# EAGLE board Mouse_Curr (EAGLE 9.6.2)
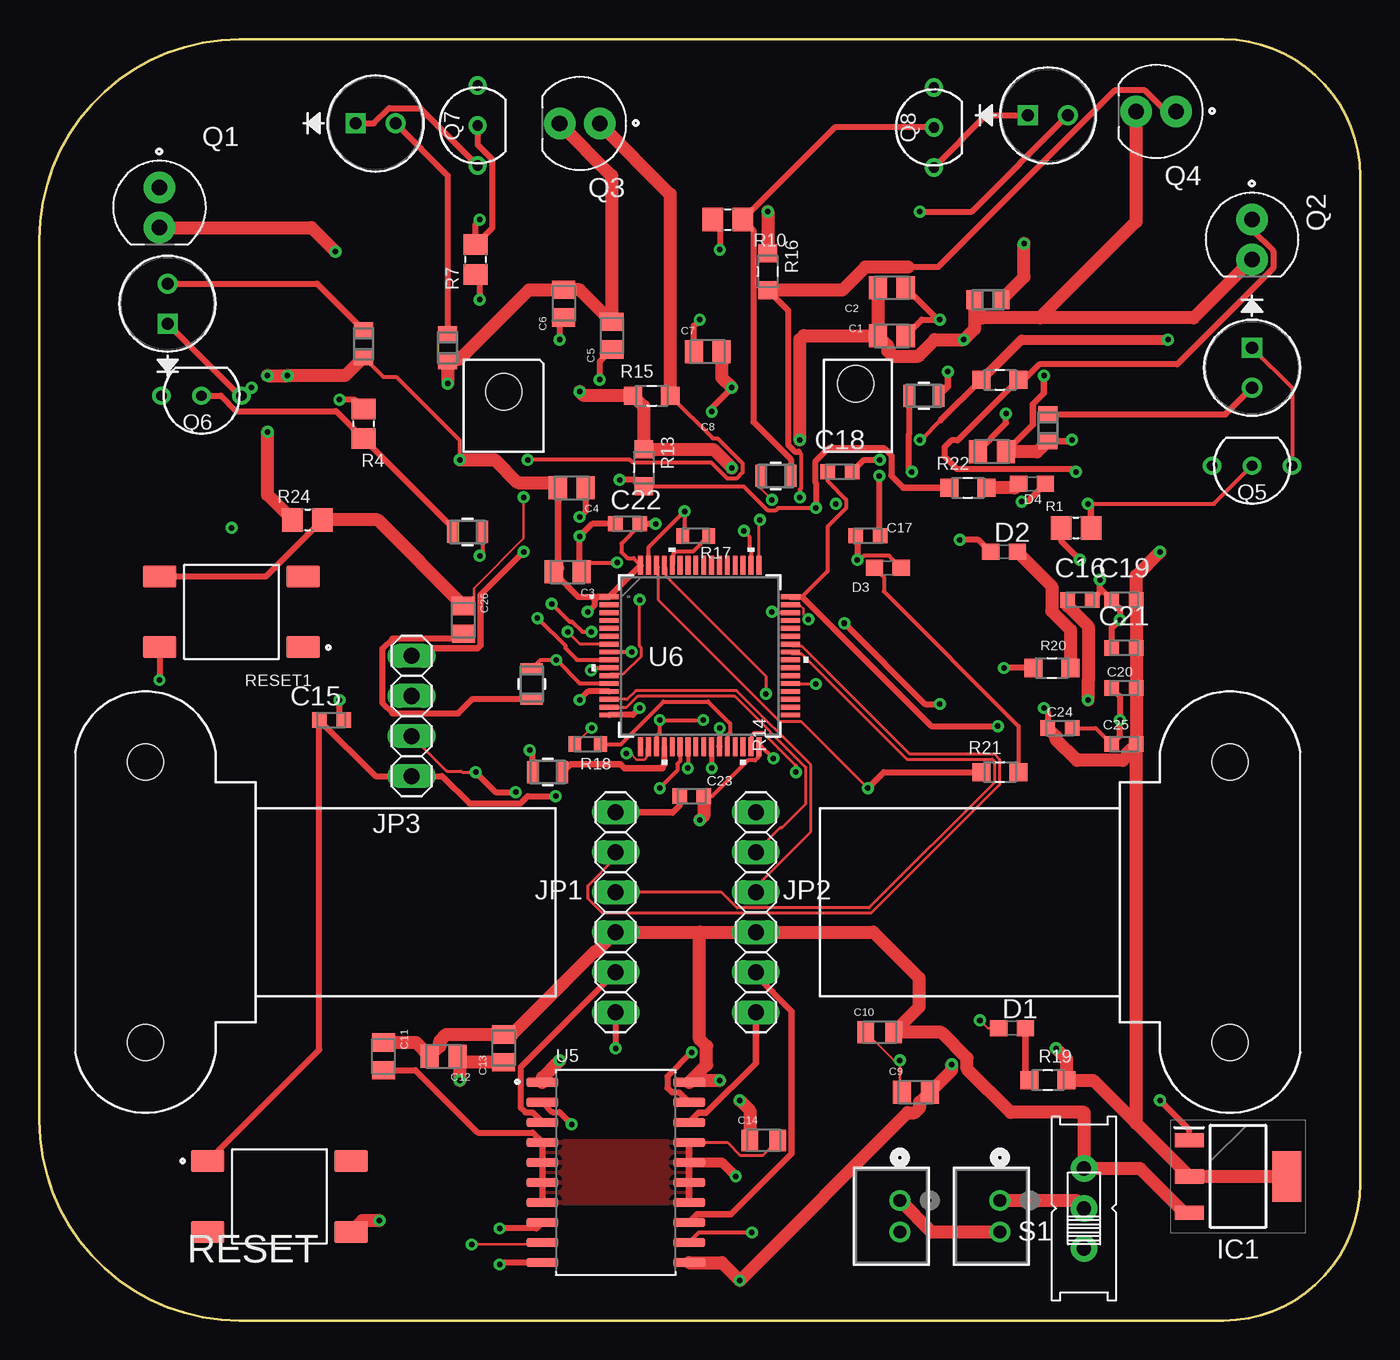
[diagram p0: board, top side]
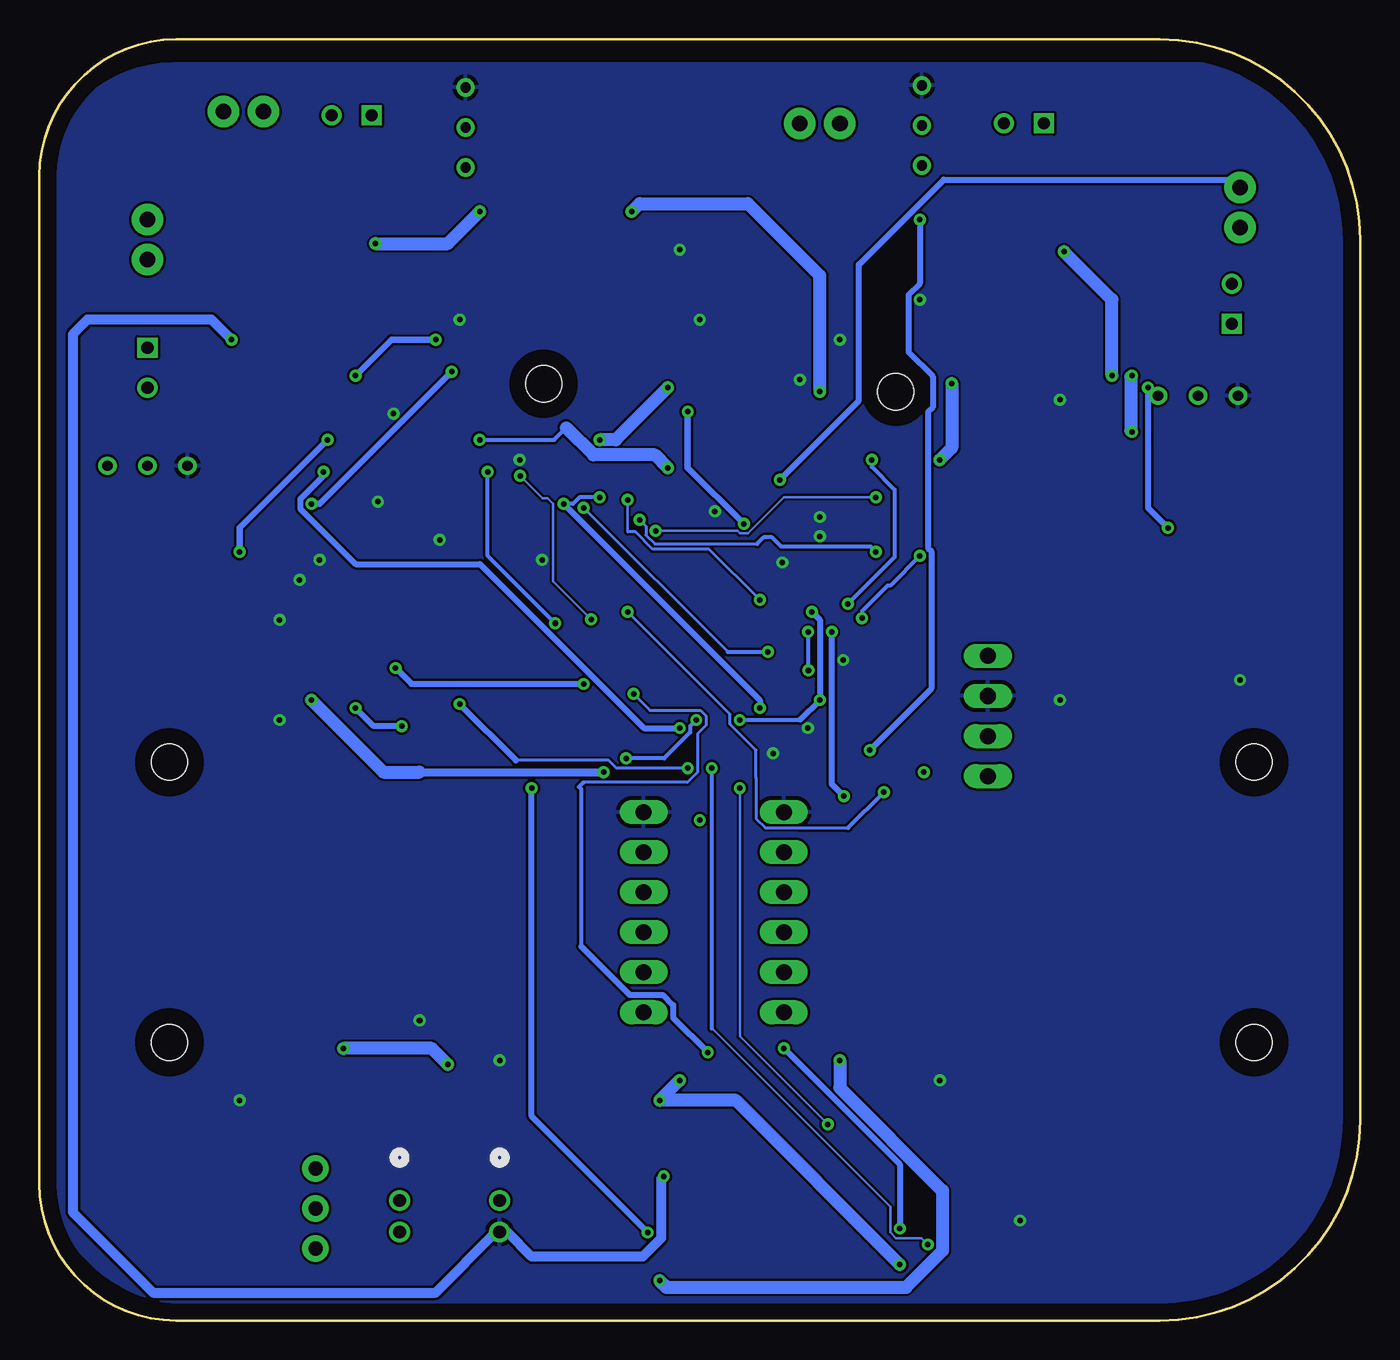
[diagram p1: board, bottom side, seen from below]

Size 83.82 x 81.28 mm. Coordinates in mm from the lower left corner, seen from the top.
Outline: 0,68.58 0,12.7 arc90 12.7,0 75.15,0 arc90 83.82,8.67 83.82,72.61 arc90 75.15,81.28 12.7,81.28 arc90 0,68.58
Copper layers (1*16): Top 0.035mm / dielectric 1.5mm / Bottom 0.035mm
Design rules "default": minimum track width 6mil, minimum drill 0.35mm, track to track 6mil, track to pad 6mil, pad to pad 6mil, via to via 6mil, smd to smd 6mil, copper to edge 40mil, drill to drill 6mil, minimum pad ring 10mil, minimum via ring 8mil, stop-mask expansion 4mil, vias tented up to drill 0mil, thermal gap 10mil
Holes 2.29 mm at 29.46,58.93 51.82,59.44

## Footprints (pad centres in the part's own frame; a part is rotated, then mirrored left to right if it is on the bottom)
CAPC2012X145N = smd 1.15 x 1.47: 1 -0.88,0; 2 0.88,0
CAPC2012X150N = smd 1.15 x 1.47: 1 -0.88,0; 2 0.88,0
CAPC2012X135N = smd 1.05 x 1.38: 1 -0.888,0; 2 0.888,0
CAPC1608X85 = smd 0.921 x 0.97: 1 -0.775,0; 2 0.775,0
0603 = smd 1.1 x 1: 1 -0.85,0; 2 0.85,0
SOT230P700X170-4N = smd 1.85 x 0.9: 1 -3.1,2.3; 2 -3.1,0; 3 -3.1,-2.3 | smd 1.85 x 3.2: 4 3.1,0
CONN_B2B-PH-K-S(LF)(SN)_JST = drill 0.813 pad 1.321: 1 0,0; 2 -2.007,0
1X06 = drill 1.016 long: 1 -6.35,0; 2 -3.81,0; 3 -1.27,0; 4 1.27,0; 5 3.81,0; 6 6.35,0
1X04 = drill 1.016 long: 1 -3.81,0; 2 -1.27,0; 3 1.27,0; 4 3.81,0
LED_INL-5AMIR15_INO = drill 0.762 pad 1.27 square: 1 0,0 | drill 0.762 pad 1.27: 2 2.54,0
XDCR_SFH_313_FA-3/4 = drill 1 pad 2: 1 -1.27,0; 2 1.27,0
TO92 = drill 0.65 pad 1.041: 1 -2.54,0; 2 0,0; 3 2.54,0
RESC2012X60 = smd 1.3 x 1.5: 1 -0.95,0; 2 0.95,0
RC0805N_PAN = smd 1.006 x 1.2: 1 -0.853,0; 2 0.853,0
0805_VIS = smd 0.703 x 1.4: 1 -0.952,0; 2 0.952,0
RES_ERA6AEB182V = smd 1.15 x 1.15: 1 -1.175,0; 2 1.175,0
RESC1608X60 = smd 0.799 x 0.974: 1 -0.815,0; 2 0.815,0
RES_ERJ6DQJ1R3V = smd 1.15 x 1.15: 1 -1.175,0; 2 1.175,0
TE_FSM4JSMA = smd 2.1 x 1.38: 1 -4.55,2.24; 2 4.55,2.24; 3 -4.55,-2.24; 4 4.55,-2.24
EG1218 = drill 0.9 pad 1.676: O -2.54,0; P 0,0; S 2.54,0
SOIC127P1032X265-20N = smd 2.05 x 0.6: 1 -4.655,5.715; 2 -4.655,4.445; 3 -4.655,3.175; 4 -4.655,1.905; 5 -4.655,0.635; 6 -4.655,-0.635; 7 -4.655,-1.905; 8 -4.655,-3.175; 9 -4.655,-4.445; 10 -4.655,-5.715; 11 4.655,-5.715; 12 4.655,-4.445; 13 4.655,-3.175; 14 4.655,-1.905; 15 4.655,-0.635; 16 4.655,0.635; 17 4.655,1.905; 18 4.655,3.175; 19 4.655,4.445; 20 4.655,5.715
LQFP64-10X10MM = smd 1.194 x 0.305: 1 -5.75,3.75; 2 -5.75,3.25; 3 -5.75,2.75; 4 -5.75,2.25; 5 -5.75,1.75; 6 -5.75,1.25; 7 -5.75,0.75; 8 -5.75,0.25; 9 -5.75,-0.25; 10 -5.75,-0.75; 11 -5.75,-1.25; 12 -5.75,-1.75; 13 -5.75,-2.25; 14 -5.75,-2.75; 15 -5.75,-3.25; 16 -5.75,-3.75; 33 5.75,-3.75; 34 5.75,-3.25; 35 5.75,-2.75; 36 5.75,-2.25; 37 5.75,-1.75; 38 5.75,-1.25; 39 5.75,-0.75; 40 5.75,-0.25; 41 5.75,0.25; 42 5.75,0.75; 43 5.75,1.25; 44 5.75,1.75; 45 5.75,2.25; 46 5.75,2.75; 47 5.75,3.25; 48 5.75,3.75 | smd 0.305 x 1.194: 17 -3.75,-5.75; 18 -3.25,-5.75; 19 -2.75,-5.75; 20 -2.25,-5.75; 21 -1.75,-5.75; 22 -1.25,-5.75; 23 -0.75,-5.75; 24 -0.25,-5.75; 25 0.25,-5.75; 26 0.75,-5.75; 27 1.25,-5.75; 28 1.75,-5.75; 29 2.25,-5.75; 30 2.75,-5.75; 31 3.25,-5.75; 32 3.75,-5.75; 49 3.75,5.75; 50 3.25,5.75; 51 2.75,5.75; 52 2.25,5.75; 53 1.75,5.75; 54 1.25,5.75; 55 0.75,5.75; 56 0.25,5.75; 57 -0.25,5.75; 58 -0.75,5.75; 59 -1.25,5.75; 60 -1.75,5.75; 61 -2.25,5.75; 62 -2.75,5.75; 63 -3.25,5.75; 64 -3.75,5.75
MOTOR = hole 2.286: -28.575,14.605; -28.575,-3.175

## Placement (x,y rotation side)
C1  0.1 uF  [CAPC2012X145N]  54.1,62.48 180 top
C2  4.7 uF  [CAPC2012X150N]  54.1,65.53 180 top
C3  0.1 uF  [CAPC2012X145N]  33.53,47.5 180 top
C4  4.7 uF  [CAPC2012X150N]  33.78,52.83 180 top
C5  0.1 uF  [CAPC2012X145N]  36.32,62.48 90 top
C6  4.7 uF  [CAPC2012X150N]  33.27,64.52 90 top
C7  0.1 uF  [CAPC2012X145N]  42.42,61.47 0 top
C8  4.7 uF  [CAPC2012X150N]  60.45,55.12 0 top
C9  22 uF  [CAPC2012X145N]  55.63,14.48 0 top
C10  10 uF  [CAPC2012X135N]  53.34,18.29 0 top
C11  4.7uF  [CAPC2012X150N]  21.84,16.76 270 top
C12  4.7uF  [CAPC2012X150N]  25.65,16.76 180 top
C13  0.1uF  [CAPC2012X145N]  29.46,17.27 90 top
C14  10uF  [CAPC2012X135N]  45.97,11.43 0 top
C15  0.1 μF  [CAPC1608X85]  18.54,38.1 0 top
C16  2.2 μF  [CAPC1608X85]  66.04,45.72 0 top
C17  2.2 μF  [CAPC1608X85]  52.58,49.78 180 top
C18  0.1 μF  [CAPC1608X85]  50.8,53.85 0 top
C19  0.1 μF  [CAPC1608X85]  68.83,45.72 0 top
C20  1 μF  [CAPC1608X85]  68.83,40.13 180 top
C21  0.1 μF  [CAPC1608X85]  68.83,42.67 0 top
C22  0.1 μF  [CAPC1608X85]  37.34,50.55 0 top
C23  0.1 μF  [CAPC1608X85]  41.4,33.27 0 top
C24  0.1 μF  [CAPC1608X85]  64.77,37.59 180 top
C25  10 μF  [CAPC1608X85]  68.83,36.58 0 top
C26  0.1 uF  [CAPC2012X145N]  26.92,44.45 270 top
D1  LTST-C191KRKT  [0603]  61.72,18.54 0 top
D2  LTST-C191KGKT  [0603]  61.21,48.77 0 top
D3  LTST-C191KGKT  [0603]  53.85,47.75 180 top
D4  LTST-C191KGKT  [0603]  62.99,53.09 180 top
IC1  AZ1117IH-3.3TRG1  [SOT230P700X170-4N]  76.07,9.14 0 top
J1  B2B-PH-K-S(LF)(SN)  [CONN_B2B-PH-K-S(LF)(SN)_JST]  60.96,7.62 90 top
J2  B2B-PH-K-S(LF)(SN)  [CONN_B2B-PH-K-S(LF)(SN)_JST]  54.61,7.62 90 top
JP1  [1X06]  36.58,25.91 270 top
JP2  [1X06]  45.47,25.91 270 top
JP3  [1X04]  23.62,38.35 90 top
LED1  INL-5AMIR15  [LED_INL-5AMIR15_INO]  76.96,61.72 270 top
LED2  INL-5AMIR15  [LED_INL-5AMIR15_INO]  8.13,63.25 90 top
LED3  INL-5AMIR15  [LED_INL-5AMIR15_INO]  20.07,75.95 0 top
LED4  INL-5AMIR15  [LED_INL-5AMIR15_INO]  62.74,76.45 0 top
Q1  SFH_313_FA-3/4  [XDCR_SFH_313_FA-3/4]  7.62,70.61 270 top
Q2  SFH_313_FA-3/4  [XDCR_SFH_313_FA-3/4]  76.96,68.58 270 top
Q3  SFH_313_FA-3/4  [XDCR_SFH_313_FA-3/4]  34.29,75.95 180 top
Q4  SFH_313_FA-3/4  [XDCR_SFH_313_FA-3/4]  70.87,76.71 180 top
Q5  BS170  [TO92]  76.96,54.23 180 top
Q6  BS170  [TO92]  10.29,58.67 180 top
Q7  BS170  [TO92]  27.81,75.82 90 top
Q8  BS170  [TO92]  56.77,75.69 90 top
R1  47kO  [RESC2012X60]  65.79,50.29 0 top
R2  51O  [RC0805N_PAN]  64.01,56.64 90 top
R3  100O  [0805_VIS]  56.13,58.67 0 top
R4  47kO  [RESC2012X60]  20.57,56.9 270 top
R5  51O  [RC0805N_PAN]  20.57,61.98 90 top
R6  100O  [0805_VIS]  27.18,50.04 180 top
R7  47kO  [RESC2012X60]  27.69,67.31 90 top
R8  51O  [RC0805N_PAN]  25.91,61.72 90 top
R9  100O  [0805_VIS]  32.26,34.8 180 top
R10  47kO  [RESC2012X60]  43.69,69.85 0 top
R11  51O  [RC0805N_PAN]  60.2,64.77 0 top
R12  100O  [0805_VIS]  46.74,53.59 0 top
R13  1.8kO  [RES_ERA6AEB182V]  38.35,54.1 270 top
R14  1.8kO  [RES_ERA6AEB182V]  60.96,59.69 0 top
R15  1.8kO  [RES_ERA6AEB182V]  38.86,58.67 0 top
R16  1.8kO  [RES_ERA6AEB182V]  46.23,66.55 270 top
R17  10K  [RESC1608X60]  41.66,49.78 180 top
R18  10K  [RESC1608X60]  34.8,36.58 0 top
R19  1.3 Ohm  [RES_ERJ6DQJ1R3V]  64.01,15.24 180 top
R20  1.3 Ohm  [RES_ERJ6DQJ1R3V]  64.26,41.4 0 top
R21  1.3 Ohm  [RES_ERJ6DQJ1R3V]  60.96,34.8 0 top
R22  1.3 Ohm  [RES_ERJ6DQJ1R3V]  58.93,52.83 0 top
R23  100O  [0805_VIS]  31.24,40.39 90 top
R24  47kO  [RESC2012X60]  17.02,50.8 0 top
RESET  FSM4JSMA  [TE_FSM4JSMA]  15.24,7.87 0 top
RESET1  FSM4JSMA  [TE_FSM4JSMA]  12.19,44.96 180 top
S1  EG1218S  [EG1218]  66.29,7.11 90 top
U5  L293DD  [SOIC127P1032X265-20N]  36.58,9.4 0 top
U6  STM32F205RGT6  [LQFP64-10X10MM]  41.91,42.16 0 top
U$1  [MOTOR]  35.31,20.83 0 top
U$2  [MOTOR]  46.99,32.26 180 top

## Library data of the parts
C1 C3 C5 C7 C13 C26 = C2012X7R2A104K125AA; DESCRIPTION: 0.1µF ±10% 100V Ceramic Capacitor X7R 0805 (2012 Metric); MF: TDK; MP: C2012X7R2A104K125AA; PACKAGE: 2012 TDK; PURCHASE-URL: https://pricing.snapeda.com/search/part/C2012X7R2A104K125AA/?ref=eda
C2 C4 C6 C8 C11 C12 = CGA4J1X7R1E475K125AE; DESCRIPTION: 4.7µF ±10% 25V Ceramic Capacitor X7R 0805 (2012 Metric); MF: TDK; MP: CGA4J1X7R1E475K125AE; PACKAGE: 2012 TDK; PURCHASE-URL: https://pricing.snapeda.com/search/part/CGA4J1X7R1E475K125AE/?ref=eda
C9 = C2012X5R1A226M125AB; DESCRIPTION: 22µF ±20% 10V Ceramic Capacitor X5R 0805 (2012 Metric); MF: TDK; MP: C2012X5R1A226M125AB; PACKAGE: 2012 TDK; PURCHASE-URL: https://pricing.snapeda.com/search/part/C2012X5R1A226M125AB/?ref=eda
C10 C14 = GRM21BR61C106KE15L; DESCRIPTION: SMD Capacitor X5R(EIA) with Capacitance: 10uF Tol. 10%. Rated Voltage: 16Vdc; DIGI-KEY_PART_NUMBER: 490-3886-2-ND; MF: Murata; MP: GRM21BR61C106KE15L; PACKAGE: 2012 Murata; PURCHASE-URL: https://pricing.snapeda.com/search/part/GRM21BR61C106KE15L/?ref=eda
C15 C22-C25 = Capacitor2; CATEGORY: Capacitor
C16-C21 = Capacitor; CATEGORY: Capacitor
D1 = LTST-C191KRKT; AVAILABILITY: In Stock; DESCRIPTION: Red 631nm LED Indication - Discrete 2V 0603 (1608 Metric); MF: Lite-On Inc.; MP: LTST-C191KRKT; PACKAGE: 0603 Lite-On Inc.; PRICE: None; PURCHASE-URL: https://pricing.snapeda.com/search/part/LTST-C191KRKT/?ref=eda
D2-D4 = LTST-C191KGKT; AVAILABILITY: In Stock; DESCRIPTION: Green 571nm LED Indication - Discrete 2V 0603 (1608 Metric); MF: Lite-On Inc.; MP: LTST-C191KGKT; PACKAGE: 0603 Lite-On Inc.; PRICE: None; PURCHASE-URL: https://pricing.snapeda.com/search/part/LTST-C191KGKT/?ref=eda
IC1 = AZ1117IH-3.3TRG1; AVAILABILITY: In Stock; DESCRIPTION: Linear Voltage Regulator IC Positive Fixed 1 Output 1A SOT-223-3; MF: Diodes Inc.; MP: AZ1117IH-3.3TRG1; PACKAGE: SOT-223 Diodes Inc.; PRICE: None; PURCHASE-URL: https://pricing.snapeda.com/search/part/AZ1117IH-3.3TRG1/?ref=eda
J1 J2 = 2 Pin JST Connector; COPYRIGHT: Copyright (C) 2022 Ultra Librarian. All rights reserved.; DIGI-KEY_PART_NUMBER_1: 455-1704-ND; MANUFACTURER_PART_NUMBER: B2B-PH-K-S(LF)(SN); MFR_NAME: JST
JP1-JP3 = pinhead
LED1-LED4 = IR Emitter; COPYRIGHT: Copyright (C) 2022 Ultra Librarian. All rights reserved.; DIGI-KEY_PART_NUMBER_1: 1830-INL-5AMIR15-ND; MANUFACTURER_PART_NUMBER: INL-5AMIR15; MFR_NAME: Inolux
Q1-Q4 = SFH_313_FA-3_4; AVAILABILITY: Unavailable; DESCRIPTION: Phototransistors 870nm Top View Radial - 2 Leads; MF: OSRAM Opto; MP: SFH 313 FA-3/4; PACKAGE: Radial-2 Osram Opto; PRICE: None
Q5-Q8 = BS170-CORRECT; AVAILABILITY: In Stock; DESCRIPTION: N-Channel 60 V 500mA (Ta) 830mW (Ta) Through Hole TO-92-3; MF: ON; MP: BS170; PACKAGE: E-PKG AXIAL-LEADED-2 ON Semiconductor; PRICE: None; PURCHASE-URL: https://pricing.snapeda.com/search/part/BS170/?ref=eda
R1 R4 R7 R10 R24 = RC0805JR-1347KL; DESCRIPTION: 47 kOhms ±5% 0.125W, 1/8W Chip Resistor 0805 (2012 Metric) Thick Film; DIGI-KEY_PART_NUMBER: 13-RC0805JR-1347KLTR-ND; MF: Yageo; MP: RC0805JR-1347KL; PACKAGE: 0805 Yageo; PURCHASE-URL: https://pricing.snapeda.com/search/part/RC0805JR-1347KL/?ref=eda
R2 R5 R8 R11 = 51resistor; COPYRIGHT: Copyright (C) 2022 Ultra Librarian. All rights reserved.; MANUFACTURER_PART_NUMBER: ERJ-6ENF51R0V; MFR_NAME: Panasonic
R3 R6 R9 R12 R23 = 100resistor; COPYRIGHT: Copyright (C) 2022 Ultra Librarian. All rights reserved.; DIGI-KEY_PART_NUMBER_1: Y4022-100ACT-ND; DIGI-KEY_PART_NUMBER_2: Y4022-100ADKR-ND; DIGI-KEY_PART_NUMBER_3: Y4022-100ATR-ND; MANUFACTURER_PART_NUMBER: Y4022100R000Q0R; MFR_NAME: Vishay
R13-R16 = ERA6AEB182V; DESCRIPTION: Res Thin Film 0805 1.8K Ohm 0.1% 0.125W(1/8W) ±25ppm/C Molded SMD Automotive Punched T/R; DIGI-KEY_PART_NUMBER: P1.8KDATR-ND; MF: Panasonic; MP: ERA6AEB182V; PACKAGE: 2012-2 Panasonic; PURCHASE-URL: https://pricing.snapeda.com/search/part/ERA6AEB182V/?ref=eda
R17 R18 = Resistor2; CATEGORY: Resistor; SUB-CATEGORY: Fixed
R19-R22 = ERJ6DQJ1R3V; AVAILABILITY: In Stock; DESCRIPTION: 1.3 Ohms 5% 0.5W, 1/2W Chip Resistor 0805 (2012 Metric) Automotive AEC-Q200, Current Sense Thick Film; MF: Panasonic; MP: ERJ-6DQJ1R3V; PACKAGE: 2012-2 Panasonic; PRICE: None; PURCHASE-URL: https://pricing.snapeda.com/search/part/ERJ-6DQJ1R3V/?ref=eda
RESET RESET1 = FSM4JSMA; COMMENT: 4-1437565-1; CONFIGURATION_POLE-THROW: Single Pole - Single Throw; CONTACT_CURRENT_RATING: 50 mA; DESCRIPTION: Tactile Switch SPST-NO Top Actuated Surface Mount; DIGI-KEY_PART_NUMBER: 450-1759-2-ND; EU_ROHS_COMPLIANCE: Compliant; MF: TE Connectivity; MP: FSM4JSMA; PACKAGE: None; PURCHASE-URL: https://pricing.snapeda.com/search/part/FSM4JSMA/?ref=eda
S1 = EG1218; AVAILABILITY: In Stock; DESCRIPTION: Slide Switch SPDT Through Hole; MF: E-Switch; MP: EG1218; PACKAGE: None; PRICE: None; PURCHASE-URL: https://pricing.snapeda.com/search/part/EG1218/?ref=eda
U5 = L293DD; DESCRIPTION: Bipolar Motor Driver Parallel 20-SOIC; DIGI-KEY_PART_NUMBER: 497-1390-5-ND; MF: STMicroelectronics; MP: L293DD; PACKAGE: SOIC-20 STMicroelectronics; PURCHASE-URL: https://pricing.snapeda.com/search/part/L293DD/?ref=eda
U6 = stm32f205rgt6; COPYRIGHT: Copyright (C) 2021 Ultra Librarian. All rights reserved.; MANUFACTURER_PART_NUMBER: STM32F205RGT6; MFR_NAME: STMicroelectronics
U$1 U$2 = micromouseMotors

## Nets
3V3: C1.2 C2.2 C3.2 C4.2 C5.2 C6.2 C7.2 C8.2 C9.2 C18.1 C19.2 C20.1 C21.2 C22.2 C23.2 C24.2 C25.2 IC1.2 IC1.4 Q1.2 Q2.2 Q3.2 Q4.2 R2.1 R5.1 R8.1 R11.1 R19.1 R24.1 U5.1 U5.11 U6.1 U6.13 U6.19 U6.32 U6.48 U6.64
AGND: R13.1 R14.1 R15.1 R16.1
GND: C1.1 C2.1 C3.1 C4.1 C5.1 C6.1 C7.1 C8.1 C9.1 C10.1 C12.1 C13.1 C15.2 C16.2 C17.2 C18.2 C19.1 C20.2 C21.1 C22.1 C23.1 C24.1 C25.1 D1.1 D2.1 D3.1 D4.1 IC1.1 J2.2 JP1.1 JP2.1 JP3.3 Q5.3 Q6.3 Q7.3 Q8.3 R1.1 R4.1 R7.1 R10.1 R17.2 R18.1 R23.2 RESET1.2 RESET.4 U6.12 U6.18 U6.63
M1L: JP1.6 U5.8
M1R: JP2.6 U5.18
M2L: JP1.5 U5.3
M2R: JP2.5 U5.13
MGND: C11.2 C14.2 U5.4 U5.5 U5.6 U5.7 U5.14 U5.15 U5.16 U5.17
N$1: Q5.2 R1.2 R3.2
N$2: Q6.2 R4.2 R6.2
N$3: LED2.2 R5.2
N$4: LED2.1 Q6.1
N$5: LED1.2 R2.2
N$6: LED1.1 Q5.1
N$7: Q7.2 R7.2 R9.2
N$8: LED3.2 R8.2
N$9: LED3.1 Q7.1
N$10: Q8.2 R10.2 R12.2
N$11: LED4.2 R11.2
N$12: LED4.1 Q8.1
N$13: J1.2 J2.1
N$20: C17.1 U6.47
N$21: R17.1 U6.60
N$22: R18.2 U6.28
N$23: C16.1 U6.31
N$24: J1.1 S1.P
N$25: D1.2 R19.2
N$26: D2.2 R20.2
N$27: D3.2 R21.2
N$28: D4.2 R22.2
N$30: C26.2 R23.1
NRST: C15.1 JP3.1 RESET.1 U6.7
PA0: JP2.3 U6.14
PA1: JP2.2 U6.15
PA2: Q4.1 R16.2 U6.16
PA4: R9.1 U6.20
PA6: U5.2 U6.22
PA7: U5.9 U6.23
PA8: JP1.3 U6.41
PA9: JP1.2 U6.42
PA15: C26.1 R24.2 RESET1.4 U6.50
PB0: R3.1 U6.26
PB1: Q2.1 R14.2 U6.27
PB8: U5.19 U6.61
PB9: R21.1 U5.12 U6.62
PC0: Q1.1 R13.2 R22.1 U6.8
PC1: R6.1 U6.9
PC2: Q3.1 R15.2 U6.10
PC3: R12.1 U6.11
PC6: R20.1 U6.37
SWCLK: JP3.4 U6.49
SWDIO: JP3.2 U6.46
VCC: C10.2 C11.1 C12.2 C13.2 C14.1 IC1.3 JP1.4 JP2.4 S1.S U5.10 U5.20

## Tracks (layer width: path | path; a pad name or v marks a point on that pad's centre or on a via)
3V3  (via drill 0.35)
  Top 0.254: C23.2 42.69,33.27 44.96,35.54 45.43,35.54 45.63,35.74 45.63,36.39 U6.32 45.84,36.41 v46.58,35.67 | R5.1 21.83,59.87 22.64,59.87 26.67,55.83 v26.67,54.61 | C22.2 38.11,50.47 36.93,49.29 36.93,48.75 37.32,48.36 37.71,48.36 38.11,47.96 | v42.13,38.1 v39.37,38.1 39.37,37.27 39.19,37.09 39.19,36.44 U6.19 | 48.4,45.91 50.02,47.54 50.02,50.37 51.2,51.54 51.2,52.09 50.02,53.27 C18.1
  Top 0.381: 38.11,47.96 U6.64 U6.1 | C3.2 33.49,46.66 33.49,46.62 34.2,45.91 U6.1 | U6.48 48.4,45.91 56.6,37.71 v60.82,37.71 | v63.75,38.86 63.99,38.62 C24.2 | U6.1 35.42,45.91 35.22,45.71 35.22,45.38 v34.8,44.96 | U6.13 34.83,39.91 v34.29,39.37
  Top 0.406: 32.9,47.75 C4.2 | C8.2 63.05,56.84 63.05,58.15 63.75,58.85 v63.75,59.94 | v65.53,55.88 65.44,55.79 R2.1 | v43.94,59.18 42.67,57.91 v42.67,57.66 | v39.12,50.55 C22.2
  Top 0.813: C24.2 64.53,37.06 64.53,36.88 65.87,35.53 68.75,35.53 69.08,35.86 69.08,36.05 C25.2 | C2.2 C1.2 | R2.1 63.34,55.12 C8.2 | C7.2 43.3,59.83 v43.94,59.18 | v57.91,16.26 57.91,15.88 C9.2 55.88,13.85 55.88,13.51 55.55,13.18 55.09,13.18 v44.45,2.54 43.31,3.68 U5.11 | v64.52,17.27 65.18,16.61 R19.1 66.88,15.24 69.61,12.51 | 69.61,12.51 IC1.2 IC1.4 | 69.61,12.51 C25.2 | C3.2 32.9,47.75 | R5.1 19.39,59.94 v15.75,59.94 v14.48,59.94 | v25.91,59.44 R8.1 26.04,61 26.68,61 31.07,65.4 C6.2 34.29,65.4 C5.2 36.32,72.64 Q3.2 | v26.67,54.61 28.91,54.61 30.36,53.16 32.57,53.16 C4.2 | v71.12,48.77 69.61,47.26 C19.2 C21.2 C20.1 C25.2 | Q2.2 73.26,63.61 63.5,63.61 | 63.5,63.61 59.86,63.61 59.48,64 59.48,64.64 R11.1 59.34,62.9 v58.67,62.23 56.83,62.23 55.79,61.19 54.18,61.19 53.85,61.52 53.85,61.86 C1.2 | v48.26,55.88 48.26,62.23 48.51,62.48 C1.2 | Q4.2 69.6,69.71 63.5,63.61 | Q1.2 17.27,69.34 v18.8,67.82 | R24.1 14.48,52.39 v14.48,56.39 | U5.1 31.92,15.41 v33.02,16.51 | C23.2 42.18,32.02 v41.91,31.75
  Bottom 0.254: v14.48,56.39 14.55,56.46 | 14.55,59.87 v14.48,59.94 | 35.52,38.14 35.56,38.1 v39.37,38.1 | v42.13,38.1 42.52,37.71 42.52,37.32 44.17,35.67 v46.58,35.67
  Bottom 0.381: v60.82,37.71 62.6,37.71 v63.75,38.86 | 35.52,38.14 v34.29,39.37 34.29,44.45 v34.8,44.96
  Bottom 0.406: v63.75,59.94 61.47,62.23 v58.67,62.23 | v71.12,48.77 71.12,50.29 v65.53,55.88 | v42.67,57.66 42.67,54.1 v39.12,50.55
  Bottom 0.813: v48.26,55.88 47.24,55.88 v43.94,59.18 | v15.75,59.94 15.75,64.77 v18.8,67.82 | v25.91,59.44 25.91,55.37 v26.67,54.61 | 14.55,59.87 14.55,56.46 | v57.91,16.26 58.93,17.27 v64.52,17.27 | v33.02,16.51 33.02,14.78 26.5,8.25 26.5,4.44 28.82,2.11 44.02,2.11 v44.45,2.54
AGND  (via drill 0.35)
  Top 0.254: 57.2,57.1 55.97,55.88 v55.88,55.88
  Top 0.381: R14.1 57.2,57.1
  Top 0.635: R14.1 62.32,62.23 v71.63,62.23
  Top 0.813: v43.94,54.1 42.77,55.28 R13.1 38.35,58.01 R15.1 34.54,58.67 v34.29,58.93 | v46.23,70.36 R16.1
  Bottom 0.254: v55.88,55.88 51.15,55.88 50.39,56.64
  Bottom 0.635: v71.63,62.23 72.9,63.5 80.77,63.5 81.7,62.57 81.7,6.88 76.6,1.78 58.67,1.78 54.86,5.59 54.61,5.59
  Bottom 0.813: v43.94,54.1 44.75,54.91 48.66,54.91 50.39,56.64 | v34.29,58.93 34.29,66.29 38.86,70.87 45.72,70.87 v46.23,70.36
GND  (via drill 0.35)
  Top 0.152: D1.1 60.2,18.54 v59.69,19.05 | C9.1 54.61,14.61 v54.61,16.51 54.23,16.51 C10.1 | R18.1 35,37.59 v35.05,37.59 | U6.18 38.54,36.3 38.54,35.72 38.41,35.59 37.91,35.59 37.52,35.98 v37.25,35.98 | C23.1 40.63,33.02 | 40.13,32.26 40.18,32.21
  Top 0.254: U6.12 34.3,40.41 v32.81,41.91 31.81,41.91 R23.2 | C3.1 35,48.09 v36.66,48.09 | U6.63 38.66,49.05 v40.94,51.34 40.94,49.89 R17.2 | v51.92,48.26 52.06,48.26 52.33,48.53 53.92,48.53 D3.1 | C24.1 67.04,37.59 C25.1
  Top 0.381: IC1.1 72.97,12.12 v71.12,13.97 | R4.1 20,58.42 v19.05,58.42 | R7.1 27.94,66.11 v27.94,64.77 | C6.1 33.02,63.38 v33.02,62.23 | C5.1 35.56,60.84 v35.56,59.69 | C7.1 41.54,63.13 v41.91,63.5 | R10.1 43.18,69.41 v43.18,67.94 | C2.1 57.01,63.5 v57.15,63.5 56,63.5 C1.1 | C22.1 35.08,50.55 v34.29,49.76 34.29,47.62 C3.1 | C4.1 34.66,51.35 v34.29,50.98 | C18.2 52.34,54.61 v53.34,54.61 | C17.2 51.92,49.67 v51.92,48.26 | D2.1 59.6,49.53 v58.42,49.53 | C8.1 60.41,55.96 60.41,55.99 61.35,56.93 v61.35,57.54 | D4.1 62.71,51.96 v62.34,51.96 | R1.1 64.84,49.46 v66.04,48.26 | C16.2 67.31,46.22 v67.31,46.99 67.31,46.47 C19.1 68.58,45.2 v68.58,44.45 68.06,43.93 C21.1 | C25.1 68.58,37.1 v68.58,38.1 68.58,39.61 C20.2 | RESET1.2 7.64,40.66 v7.62,40.64 | C15.2 19.05,38.37 v19.05,39.37
  Top 0.406: JP1.1 40.13,32.26 | 40.18,32.21 40.63,32.66 40.63,33.02
  Top 0.813: C13.1 26.91,16.39 C12.1 26.67,16.63 v26.67,15.24 | RESET.4 20.51,6.35 v21.59,6.35
  pour Bottom: 1.89,79.76 75.33,79.76 arc-90 83.46,71.63 83.46,10.41 arc-90 74.06,1.02 11.43,1.02 arc-90 -0.25,12.7 -0.25,74.57 arc-45
M1L  (via drill 0.35)
  Top 0.381: JP1.6 v36.58,17.27 | U5.8 31.54,5.84 v29.21,5.84
  Bottom 0.381: v36.58,17.27 29.21,9.91 v29.21,5.84
M1R
  Top 0.406: U5.18 41.84,13.19 42.31,13.19 45.47,16.34 JP2.6
M2L
  Top 0.381: U5.3 31.29,13.2 30.84,13.2 30.55,13.49 30.55,16.07 JP1.5
M2R
  Top 0.406: U5.13 41.74,6.73 43.88,6.73 47.74,10.59 47.74,19.62 45.47,21.9 JP2.5
MGND  (via drill 0.35)
  Top 0.178: U5.17 43.66,11.3 44.46,10.5 45.93,10.5 C14.2
  Top 0.381: C11.2 23.86,15.88 27.81,11.93 31.29,11.93 U5.4
  Top 0.406: U5.7 U5.6 U5.5 U5.4 | U5.17 41.23,10.29 41.1,10.16 U5.16 U5.15 U5.14
  Top 0.635: U5.16 43.31,10.03 v44.2,9.14
  Bottom 0.635: v44.2,9.14 44.36,8.98 44.36,5.24 45.54,4.06 52.58,4.06 54.1,5.59 54.61,5.59
  pour Top: 32,11.43 32,7.37 41.4,7.37 41.4,11.43
N$1  (via drill 0.35)
  Top 0.254: v66.55,51.82 74.55,51.82 Q5.2
  Top 0.406: v57.66,60.2 57.66,59.25 R3.2 | v66.55,51.82 66.74,51.63 R1.2
  Bottom 0.406: v57.66,60.2 66.04,51.82 v66.55,51.82
N$2
  Top 0.381: R6.2 26.23,50.29 R4.2 18.82,57.7 12.5,57.7 11.52,58.67 Q6.2
N$3
  Top 0.381: R5.2 17.62,65.79 LED2.2
N$4  (via drill 0.35)
  Top 0.381: LED2.1 12.7,58.67 Q6.1 13.34,59.18 v13.46,59.18
  Bottom 0.381: v13.46,59.18 13.46,51.56 v12.19,50.29
N$5
  Top 0.381: R2.2 75.28,57.49 LED1.2
N$6
  Top 0.254: LED1.1 79.5,59.18 Q5.1
N$7  (via drill 0.35)
  Top 0.381: Q7.2 27.81,74.58 28.73,73.66 28.73,69.31 R7.2 27.69,69.6 v27.94,69.85 | R9.2 31.31,36 v31.12,36.2
  Bottom 0.381: v27.94,69.85 27.94,65.79 28.66,65.07 28.66,61.45 27.11,59.9 27.11,57.95 27.42,57.65 27.42,49.01 27.22,48.81 27.22,40.09 v31.12,36.2
N$8
  Top 0.381: LED3.2 25.91,72.64 R8.2
N$9
  Top 0.381: LED3.1 21.22,75.95 22.2,76.92 24.17,76.92 Q7.1
N$10
  Top 0.381: R12.2 47.69,54.64 45.31,57.02 45.31,69.18 R10.2 50.48,75.69 Q8.2
N$11  (via drill 0.35)
  Top 0.381: LED4.2 59.18,70.36 v55.88,70.36
  Top 0.813: R11.2 62.48,66.2 v62.48,68.33
  Bottom 0.813: v62.48,68.33 57.91,68.33 v55.88,70.36
N$12
  Top 0.381: Q8.1 60.07,76.45 LED4.1
N$13
  Top 0.813: J1.2 56.62,5.61 J2.1
N$20  (via drill 0.35)
  Top 0.152: v48.8,44.48 48.48,44.8 48.48,45.16 48.23,45.41 U6.47
  Top 0.381: C17.1 53.31,49.83 v53.31,53.59
  Bottom 0.152: v53.31,53.59 51.89,52.17 51.56,52.17 51.21,51.81 51.21,46.89 v48.8,44.48
N$21
  Top 0.254: R17.1 41.48,48.79 40.39,48.79 40.23,48.63 40.23,47.98 U6.60
N$22
  Top 0.254: R18.2 36.92,36.58 39.61,39.27 42.44,39.27 43.84,37.86 43.84,37.32 43.66,37.14 U6.28
N$23  (via drill 0.35)
  Top 0.178: 48.01,35.21 45.93,37.29
  Top 0.254: 45.93,37.29 45.39,37.29 45.23,37.13 45.23,36.48 U6.31 | 48.01,35.21 v48.01,34.8
  Top 0.813: C16.1 65.27,45.35 66.57,44.04 66.57,40.6 66.55,40.57 v66.55,39.37
  Bottom 0.508: 59.69,34.8 v48.01,34.8
  Bottom 0.813: v66.55,39.37 61.98,34.8 59.69,34.8
N$24
  Top 0.813: J1.1 65.79,7.62 S1.P
N$25
  Top 0.406: D1.2 62.57,15.5 R19.2
N$26
  Top 0.813: D2.2 64.25,46.59 64.25,45 65.44,43.81 R20.2
N$27
  Top 0.254: D3.2 53.59,47.16 53.59,46.26 62.13,37.72 R21.2
N$28
  Top 0.813: D4.2 61.89,52.83 R22.2
N$30
  Top 0.381: C26.2 26.62,43.27 22.4,43.27 21.75,42.62 21.75,39.17 22.4,38.52 26.59,38.52 27.5,39.43 R23.1
NRST  (via drill 0.35)
  Top 0.178: U6.7 34.3,42.91 v33.53,43.69
  Top 0.381: v32.77,33.27 30.99,33.27 30.53,32.81 27.29,32.81 25.55,34.54 JP3.1 21.32,34.54 C15.1 17.77,17.19 RESET.1
  Bottom 0.381: v32.77,33.27 33.53,34.04 v33.53,43.69
PA0
  Top 0.178: JP2.3 45.47,27.54 48.96,31.03 48.96,35.25 44.24,39.96 37.86,39.96 37.31,39.41 U6.14
PA1
  Top 0.178: U6.15 37.28,38.91 38,39.63 44.1,39.63 48.62,35.11 48.62,32.76 47.12,31.25 47,31.25 JP2.2
PA2  (via drill 0.35)
  Top 0.254: v48.26,52.22 48.26,52.72 48.32,52.78 48.32,55.01 48.2,55.13
  Top 0.381: U6.16 37.66,38.42 v38.1,38.86 | 48.2,55.13 47.95,55.13 47.51,55.57 47.51,64.09 R16.2 | Q4.1 71.5,76.71 70.15,78.05 68.26,78.05 57.03,66.83 55.14,66.83
  Top 0.813: R16.2 50.96,65.37 52.42,66.83 55.14,66.83
  Bottom 0.254: v50.55,51.82 49.95,51.82 49.55,52.22 v48.26,52.22
  Bottom 0.381: v50.55,51.82 38.1,39.37 v38.1,38.86
PA4
  Top 0.381: 39.56,35.05 39.57,35.06 39.57,35.17 39.66,35.26 U6.20
  Top 0.406: 39.56,35.05 37.15,35.05 36.89,35.31 33.72,35.31 R9.1
PA6  (via drill 0.35)
  Top 0.254: U6.22 40.66,35.49 40.49,35.32 40.49,34.9 v39.37,33.78
  Top 0.381: U5.2 32.55,13.22 33,13.22 v33.77,12.45 v33.78,12.45
  Bottom 0.152: v39.37,33.78 39.37,18.03 v33.78,12.45
PA7  (via drill 0.35)
  Top 0.152: U5.9 31.79,4.83 v27.43,4.83
  Top 0.254: U6.23 41.16,35.06 v41.15,35.05
  Bottom 0.152: v27.43,4.83 27.84,5.24 29.46,5.24 29.82,5.59 29.82,7.21 41.15,18.54
  Bottom 0.254: 41.15,18.54 v41.15,35.05
PA8
  Top 0.178: U6.41 47.77,42.31 48.36,42.31 55.05,35.61 60.46,35.61 60.6,35.47 60.6,34.12 52.65,26.18 44.29,26.18 43.28,27.18 JP1.3
PA9
  Top 0.178: U6.42 47.77,42.81 48.36,42.81 55.22,35.94 60.6,35.94 60.93,35.61 60.93,33.99 52.79,25.84 35.73,25.84 34.81,26.76 34.81,27.59 36.58,29.36 JP1.2
PA15  (via drill 0.35)
  Top 0.152: C26.1 27.58,45.99 27.58,46.48 30.73,49.63 v30.73,52.22
  Top 0.254: U6.50 45.16,48.91 45.06,49 45.06,49.74 v44.7,50.09
  Top 0.381: R24.2 14.37,47.2 RESET1.4
  Top 0.813: C26.1 21.45,50.8 R24.2
  Bottom 0.152: v30.73,52.22 36.58,52.22 38.87,49.94 39.37,49.94 39.52,50.09 v44.7,50.09
PB0  (via drill 0.35)
  Top 0.305: U6.26 42.66,35.06
  Top 0.381: 42.66,35.06 v42.67,35.05 | v51.09,44.24 56.21,39.12 v57.15,39.12 | R3.1 55.18,56.2 55.16,56.18 55.16,54.06 v55.37,53.85
  Bottom 0.178: v42.67,35.05 47.2,35.05 47.7,35.55 53.58,35.55
  Bottom 0.254: v51.09,44.24 55.37,48.52 v55.37,53.85
  Bottom 0.381: 53.58,35.55 v57.15,39.12
PB1  (via drill 0.35)
  Top 0.305: 43.16,37.15 U6.27
  Top 0.381: v65.79,53.85 65.69,53.85 65.5,54.04 58.22,54.04 57.45,54.82 57.45,55.42 57.87,55.84 58.28,55.84 R14.2 62.48,59.69 63.45,60.66 72.22,60.66 78.31,66.75 78.31,67.87 76.96,69.21 Q2.1 | v43.18,37.59 43.18,37.17 43.16,37.15 | U6.27
  Bottom 0.381: v65.79,53.85 65.79,53.6 67.27,52.12 67.27,51.52 63.74,47.99 55.86,47.99 55.37,47.5 45.46,37.59 v43.18,37.59
PB8  (via drill 0.35)
  Top 0.178: U6.61 39.77,47.81 39.77,47.22 46.1,40.88 v46.1,39.76
  Top 0.381: U5.19 40.6,14.47 40.15,14.47 39.86,14.76 39.86,15.48 v41.4,17.02
  Bottom 0.178: 49.28,34.15 42.7,34.15 42.05,34.8 42.05,37.21 41.51,37.75 41.51,38.36 41.88,38.72 45.07,38.72 v46.1,39.76
  Bottom 0.254: 49.42,23.73 49.42,33.71 49.57,33.86 49.29,34.15 49.28,34.15
  Bottom 0.381: v41.4,17.02 43.6,19.21 43.6,20.02 44.25,20.66 46.35,20.66 49.42,23.73
PB9  (via drill 0.35)
  Top 0.178: U6.62 39.27,47.81 39.27,45.72 46.96,38.02 48.34,38.02 v52.58,33.78
  Top 0.254: U5.12 41.87,5.59 v45.21,5.59
  Top 0.381: v52.58,33.78 53.59,34.8 R21.1
  Bottom 0.381: v45.21,5.59 52.58,12.95 v52.58,33.78
PC0  (via drill 0.35)
  Top 0.254: v49.27,51.56 46.91,51.56 46.75,51.41 46.21,51.41 44.7,52.93 R13.2 | v37.59,42.42 v37.59,42.41 U6.8
  Top 0.381: R13.2 37.94,53.34 v36.83,53.34 | 54.83,52.83 54.06,53.6 54.06,54.91 53.64,55.33 50.08,55.33 49.22,54.48 49.22,53.22 49.27,53.17 v49.27,51.56
  Top 0.406: 54.83,52.83 R22.1
  Bottom 0.178: v49.27,51.56 40.13,42.42
  Bottom 0.254: 40.13,42.42 v37.59,42.42
  Bottom 0.381: v36.83,53.34 31.81,58.36 31.81,67 26.42,72.39 8.13,72.39 Q1.1
PC1  (via drill 0.35)
  Top 0.254: R6.1 28.13,48.7 v27.94,48.51 | v31.61,44.57 33.38,42.8 33.38,42.65 34.12,41.91 U6.9
  Bottom 0.254: v27.94,48.51 29.82,46.63 29.99,46.63 31.61,45.01 v31.61,44.57
PC2  (via drill 0.35)
  Top 0.254: R15.2 42.75,55.96 43.05,55.96 44.63,54.39 44.63,53.82 44.23,53.42 43.66,53.42 42.65,54.42 37.66,54.42 37.48,54.61 v30.99,54.61 | v32.51,45.47 33.63,44.35 33.8,44.35 34.46,43.69 v35.03,43.69 | v35.01,41.26 35.17,41.41 U6.10
  Top 0.813: R15.2 40.04,70.45 40.04,71.47 Q3.1
  Bottom 0.254: v30.99,54.61 30.99,54.16 29.54,52.72 29.54,48.44 v32.51,45.47 | v35.03,43.69 35.03,41.28 v35.01,41.26
PC3  (via drill 0.35)
  Top 0.152: v46.48,52.07 45.78,52.77 R12.1
  Top 0.178: v38.1,45.72 38.1,42.79 38.21,42.67 38.21,42.16 37.07,41.02 36.27,41.02 U6.11
  Bottom 0.152: 46.48,50.04 v46.48,52.07
  Bottom 0.178: v38.1,45.72 41.33,48.95 44.9,48.95 45.99,50.04 46.48,50.04
PC6  (via drill 0.35)
  Top 0.178: U6.37 49.25,40.41 v49.28,40.39
  Top 0.381: R20.1 v61.21,41.4
  Bottom 0.381: v61.21,41.4 60.2,40.39 v49.28,40.39
SWCLK  (via drill 0.35)
  Top 0.178: U6.49 45.66,50.74 v45.72,50.8
  Top 0.406: JP3.4 24.1,42.64 27.81,42.64 28.02,42.85 28.02,46.05 v30.73,48.77
  Bottom 0.178: v45.72,50.8 45.32,50.4 45.32,49.84 44.76,49.28 38.27,49.28
  Bottom 0.254: 38.27,49.28 37.86,49.68 37.32,49.68 36.74,49.1 31.06,49.1 v30.73,48.77
SWDIO  (via drill 0.35)
  Top 0.178: U6.46 46.53,44.91 v46.48,44.96 | JP3.2 25.84,34.86 26.76,34.86 26.82,34.8 v27.69,34.8
  Top 0.381: v27.69,34.8 28.96,33.53 v30.23,33.53
  Bottom 0.178: 35.57,31.25 37.75,31.25 38.34,31.84 38.34,34.29 38.34,34.42 38.34,36.2 39.99,37.84 39.99,38.47 v46.48,44.96
  Bottom 0.203: 35.57,31.25 32.5,31.25
  Bottom 0.254: 32.5,31.25 v30.23,33.53
VCC  (via drill 0.35)
  Top 0.381: U5.10 29.34,3.68 v29.21,3.56
  Top 0.813: 41.91,24.64 JP1.4 35.36,23.42 35.27,23.42 30,18.15 C13.2 25.82,18.15 25.4,17.73 25.4,17.39 C12.2 23.89,17.64 C11.1 | 41.91,24.64 JP2.4 52.93,24.64 55.83,21.74 55.83,19.89 C10.2 57.24,18.29 58.88,16.66 58.88,15.99 61.65,13.21 66.29,13.21 S1.S 69.85,9.65 72.66,6.84 IC1.3 | v44.45,13.97 45.09,13.33 C14.1 | 41.91,24.64 41.91,17.84 42.34,17.41 42.34,16.22 U5.20 41.36,15.24 v43.18,15.24
  Bottom 0.813: v29.21,3.56 39.62,13.97 v44.45,13.97 v43.18,15.24